# Altium PCB LED_48.PcbDoc
Units mm, origin at the board's own origin, x right, y up, seen from the top; angles counter-clockwise.
Board outline 72 x 72 mm, 2 copper layers (Top Layer, Bottom Layer); 49 components, 17 nets, 118 pads, 42 vias.
Unrouted connection lines stored in the file: 2.
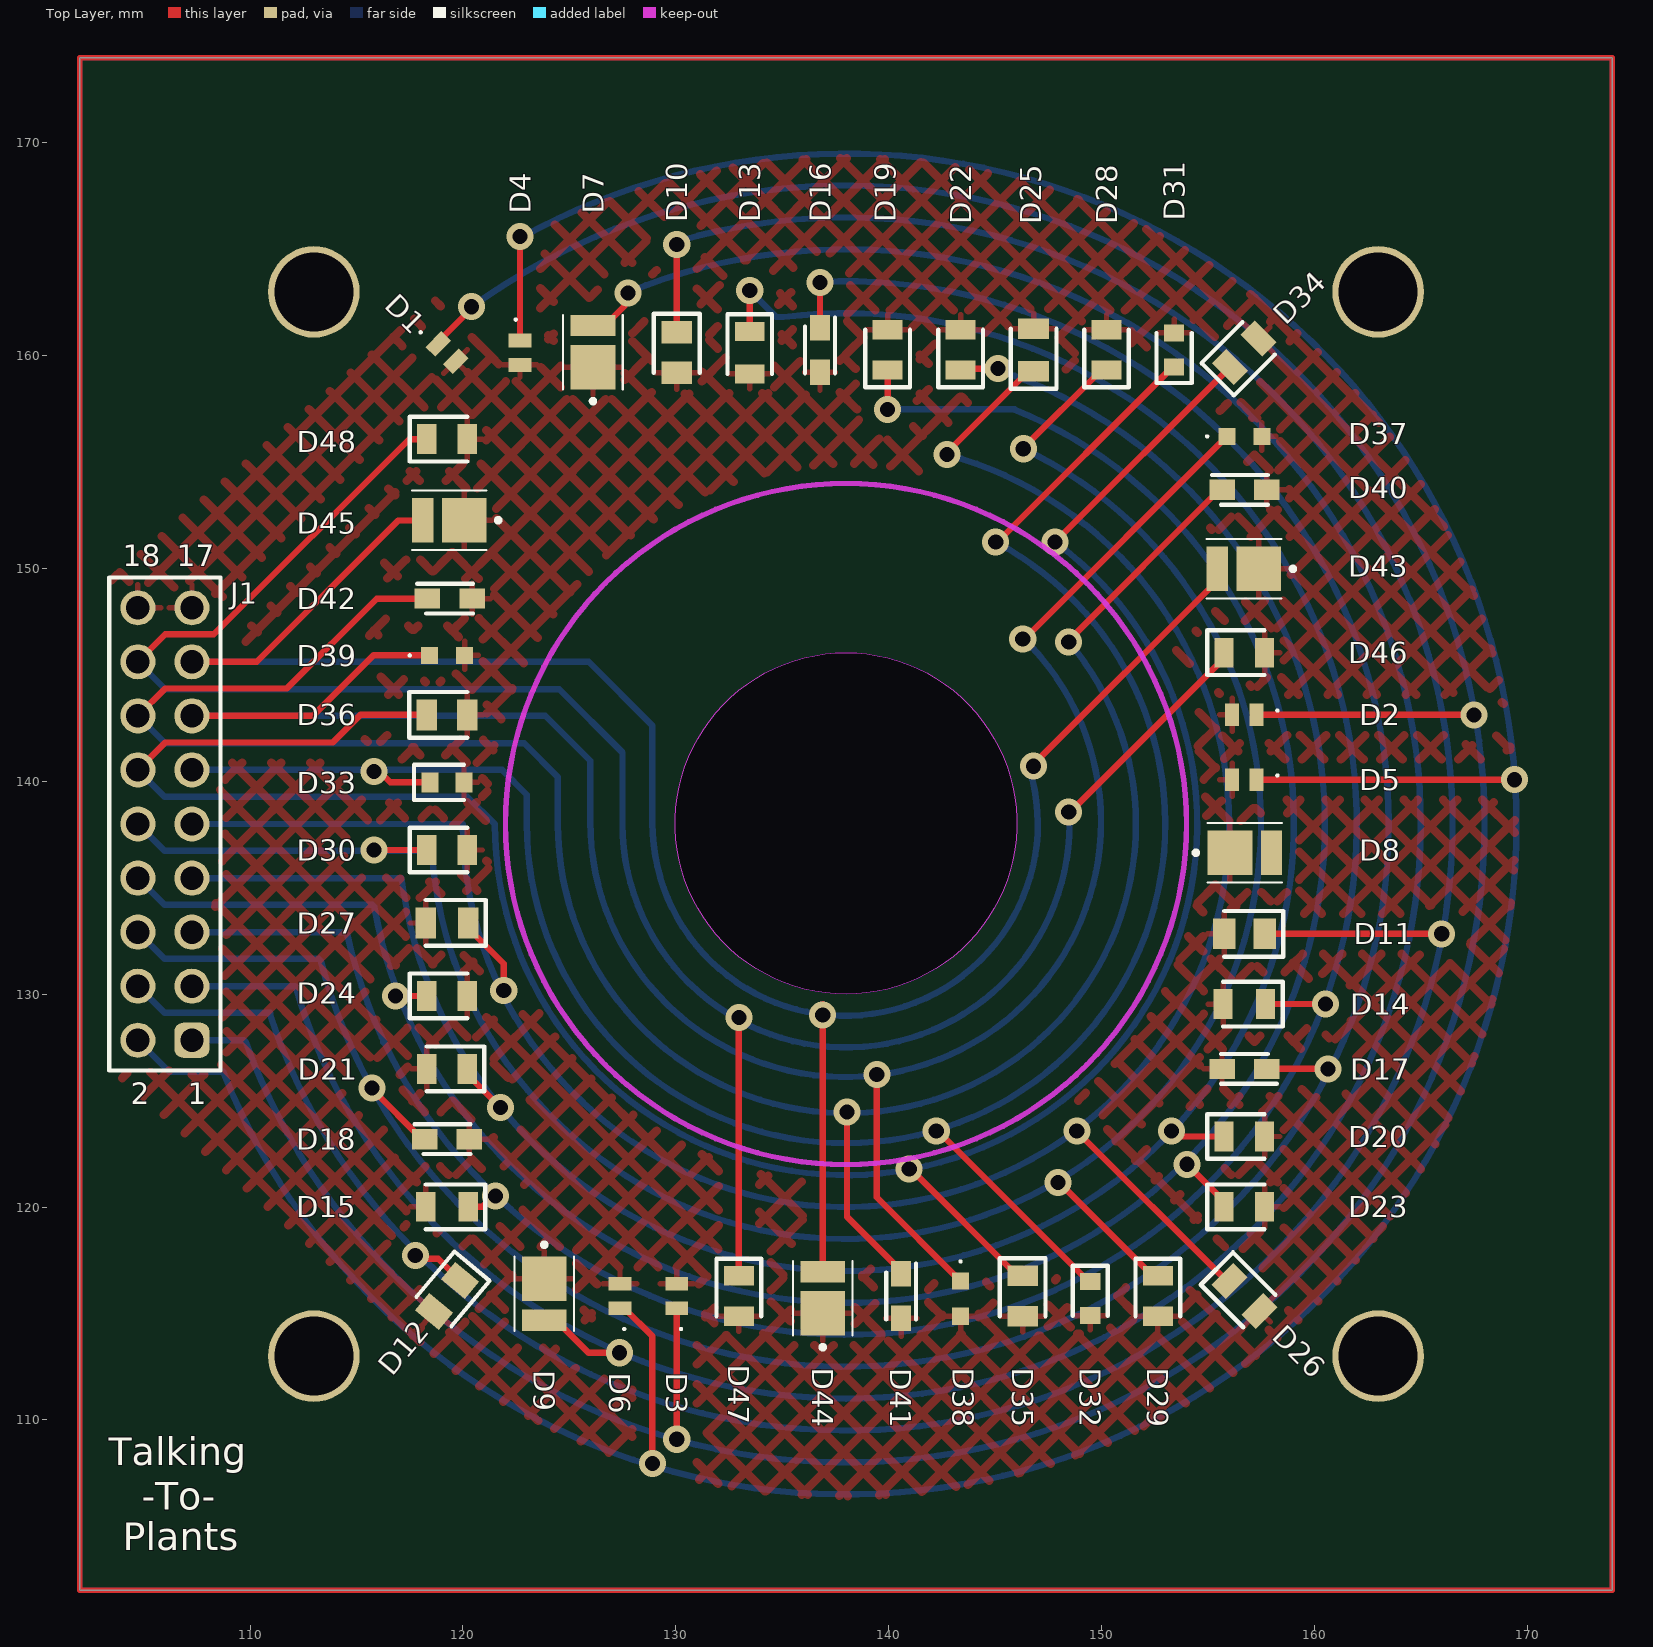
[diagram p0: Top Layer view]
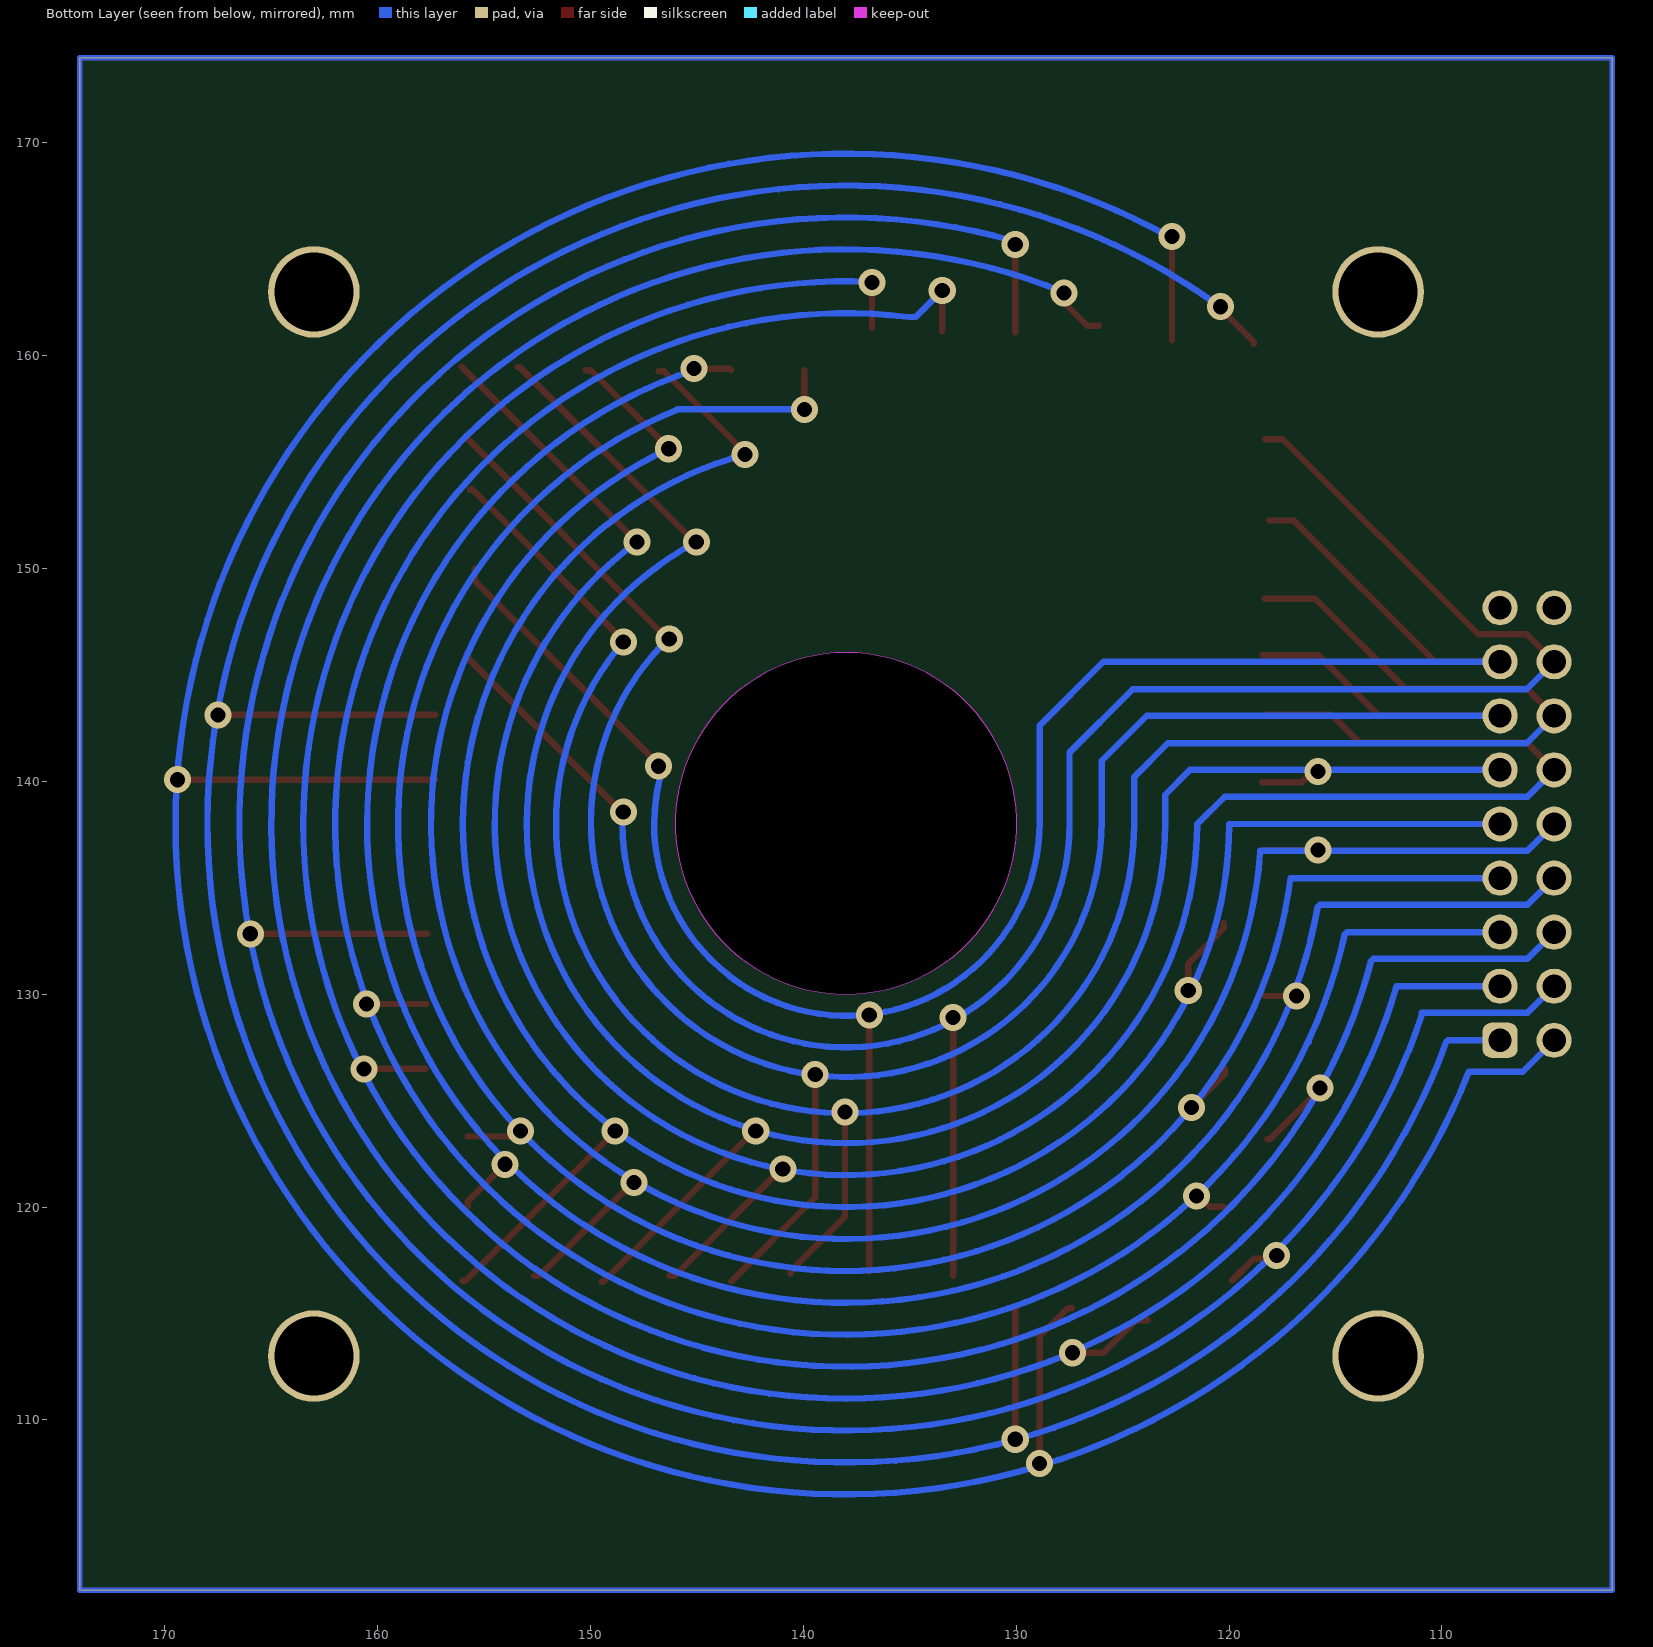
[diagram p1: Bottom Layer view, seen from below]

## Layer stack, top to bottom
Top Solder: solder mask 0.0102, Solder Resist, Dk 3.5
Top Layer: signal copper 0.0356
Dielectric 1: dielectric 0.32, FR-4, Dk 4.8
Bottom Layer: signal copper 0.0356
Bottom Solder: solder mask 0.0102, Solder Resist, Dk 3.5

## Board outline
102,102 102,174 174,174 174,102
cut-out: 138,130 cw(c138,138.025) 138,146.05 cw(c138,138.025)

## Design rules (kind name [scope] priority, off if disabled: settings)
Clearance [All] p1: gap=0.3 ignorepadtopadclearanceinfootprint=FALSE except(0.6: Arc-Fill Arc-Poly Arc-Region Track-Fill Track-Poly Track-Region SMDPad-Fill SMDPad-Poly SMDPad-Region THPad-Fill THPad-Poly THPad-Region Via-Fill Via-Poly Via-Region Fill-Fill Fill-Poly Fill-Region Poly-Poly Poly-Region Region-Region)
ComponentClearance [All] p1: gap=0.254 collisioncheckmode=3 verticalgap=0.254 showdistances=FALSE donotcheckwithout3dbody=TRUE
PolygonConnect [All] p1: connectstyle=Relief reliefconductorwidth=0.254 reliefentries=4 polygonreliefangle="90 Angle" airgapwidth=0.254
RoutingVias [All] p1: holewidth=0.711 width=1.27 viastyle="Through Hole" minholewidth=0.711 minwidth=1.27 maxholewidth=0.711 maxwidth=1.27
SolderMaskExpansion [All] p1: expansion=0.102 istentingtop=FALSE
Width [All] p1: maxlimit=1 minlimit=0.254 preferedwidth=0.254
29 further rules are at their usual default settings.

## Components (designator, comment, footprint, x,y, rotation, side; value= is the part's Value field where it differs from the comment)
D1 "ATS2012UV395" ATS2012UV395 119.253,160.147 r315 top
D2 "ATS2012UV395" ATS2012UV395 156.718,143.129 r180 top
D3 "ATS2012UV395" ATS2012UV395 130.048,115.824 r90 top
D4 "ATS2012UV395" ATS2012UV395 122.682,160.147 r270 top
D5 "ATS2012UV395" ATS2012UV395 156.718,140.081 r180 top
D6 "ATS2012UV395" ATS2012UV395 127.381,115.824 r90 top
D7 "150283DS73103" 150283DS73103 126.111,159.467 r90 top
D8 "150283DS73103" 150283DS73103 156.038,136.652 r0 top
D9 "150283DS73103" 150283DS73103 123.825,116.631 r270 top
D10 "599-0191-007F" LEDC2012X90N 130.048,160.147 r270 top
D11 "599-0191-007F" LEDC2012X90N 156.718,132.842 r180 top
D12 "599-0191-007F" LEDC2012X90N 119.253,115.824 r230 top
D13 "IN-S85ATG" LEDC2012X110N 133.477,160.147 r270 top
D14 "IN-S85ATG" LEDC2012X110N 156.718,129.54 r180 top
D15 "IN-S85ATG" LEDC2012X110N 119.253,120.015 r180 top
D16 "LT_M673-P2R1-25-Z" LEDM2214X140N 136.779,160.274 r270 top
D17 "LT_M673-P2R1-25-Z" LEDM2214X140N 156.718,126.492 r180 top
D18 "LT_M673-P2R1-25-Z" LEDM2214X140N 119.253,123.19 r0 top
D19 "SML-LX0805UWC-TR" LEDC2012X80N 139.954,160.274 r90 top
D20 "SML-LX0805UWC-TR" LEDC2012X80N 156.718,123.317 r0 top
D21 "SML-LX0805UWC-TR" LEDC2012X80N 119.253,126.492 r180 top
D22 "150080VS75000" LEDC2012X80N 143.383,160.274 r90 top
D23 "150080VS75000" LEDC2012X80N 156.718,120.015 r0 top
D24 "150080VS75000" LEDC2012X80N 119.253,129.921 r0 top
D25 "CMD17-21VYC/TR8" LEDC2012X120N 146.812,160.274 r90 top
D26 "CMD17-21VYC/TR8" LEDC2012X120N 156.718,115.824 r315 top
D27 "CMD17-21VYC/TR8" LEDC2012X120N 119.253,133.35 r180 top
D28 "150080YS75000" LEDC2012X80N 150.241,160.274 r90 top
D29 "150080YS75000" LEDC2012X80N 152.654,115.824 r270 top
D30 "150080YS75000" LEDC2012X80N 119.253,136.779 r0 top
D31 "APT1608SECK-AMT" LEDC1608X85N 153.416,160.274 r90 top
D32 "APT1608SECK-AMT" LEDC1608X85N 149.479,115.697 r270 top
D33 "APT1608SECK-AMT" LEDC1608X85N 119.253,139.954 r0 top
D34 "APT2012LSECK/J3-PRV" LEDC2012X75N 156.718,160.147 r45 top
D35 "APT2012LSECK/J3-PRV" LEDC2012X75N 146.304,115.824 r270 top
D36 "APT2012LSECK/J3-PRV" LEDC2012X75N 119.253,143.129 r0 top
D37 "APT1608SEC/J3-AMT" APT1608SECJ3AMT 156.718,156.21 r0 top
D38 "APT1608SEC/J3-AMT" APT1608SECJ3AMT 143.383,115.697 r270 top
D39 "APT1608SEC/J3-AMT" APT1608SECJ3AMT 119.253,145.923 r0 top
D40 "LT_M673-P2R1-25-Z" LEDM2214X140N 156.718,153.702 r0 top
D41 "LT_M673-P2R1-25-Z" LEDM2214X140N 140.589,115.824 r270 top
D42 "LT_M673-P2R1-25-Z" LEDM2214X140N 119.38,148.59 r0 top
D43 "150283FS73103" 150283DS73103 157.398,149.987 r180 top
D44 "150283FS73103" 150283DS73103 136.906,115.017 r90 top
D45 "150283FS73103" 150283DS73103 120.06,152.273 r180 top
D46 "APT2012SF4C-PRV" LEDC2012X85N 156.718,146.05 r0 top
D47 "APT2012SF4C-PRV" LEDC2012X85N 132.969,115.824 r270 top
D48 "APT2012SF4C-PRV" LEDC2012X85N 119.253,156.083 r0 top
J1 "61301821121" 61301821121 106,138 r90 top

## Footprints (in the part's own frame and the unit in brackets; to place one, negate y for a bottom-side part, rotate by r counter-clockwise, add the part's x,y. Pads: shape width x height; smd on the part's side, far side on the other; paste and mask are expansions set on the pad)
150283DS73103 [mm]
  rect 2.1x2.1 smd: 1(0,0)
  rect 1x2.1 smd: 2(1.95,0)
  silkscreen extent -1.7,-1.4 2.45,1.4, body extent -1.05,-1.4 2.45,1.4, height 0.95
61301821121 [mm] "Pin Header, pitch 2.54 mm, THT, Vertical, dual row, 18p"
  rrect50% 1.65x1.65 hole 1.1: 1(-10.16,-1.27)
  round 1.65 hole 1.1: 2(-10.16,1.27) 3(-7.62,-1.27) 4(-7.62,1.27) 5(-5.08,-1.27) 6(-5.08,1.27) 7(-2.54,-1.27) 8(-2.54,1.27) 9(0,-1.27) 10(0,1.27) 11(2.54,-1.27) 12(2.54,1.27) 13(5.08,-1.27) 14(5.08,1.27) 15(7.62,-1.27) 16(7.62,1.27) 17(10.16,-1.27) 18(10.16,1.27)
  silkscreen extent -11.58,-2.62 11.58,2.62, body extent -11.43,-2.54 11.43,2.54, height 8.59
APT1608SECJ3AMT [mm]
  rect 0.8x0.8 smd: 1(-0.825,0) 2(0.825,0)
  silkscreen extent -1.8,-0.05 -1.7,0.05
ATS2012UV395 [mm]
  rect 0.65x1.06 smd: 1(-0.575,0) 2(0.575,0)
  silkscreen extent -1.6,-0.25 -1.5,-0.15
LEDC1608X85N [mm]
  rect 0.8x0.95 smd: 1(-0.8,0) 2(0.8,0)
  silkscreen extent -1.55,-0.82 0.8,0.82
LEDC2012X75N [mm]
  rect 0.95x1.45 smd: 1(-0.95,0) 2(0.95,0)
  silkscreen extent -1.78,-1.07 0.95,1.07
LEDC2012X80N [mm]
  rect 0.9x1.4 smd: 1(-0.95,0) 2(0.95,0)
  silkscreen extent -1.75,-1.05 0.95,1.05
LEDC2012X85N [mm]
  rect 0.9x1.4 smd: 1(-0.95,0) 2(0.95,0)
  silkscreen extent -1.75,-1.05 0.95,1.05
LEDC2012X90N [mm]
  rect 1.05x1.45 smd: 1(-0.95,0) 2(0.95,0)
  silkscreen extent -1.83,-1.07 0.95,1.08
LEDC2012X110N [mm]
  rect 0.9x1.4 smd: 1(-1,0) 2(1,0)
  silkscreen extent -1.8,-1.05 1,1.05
LEDC2012X120N [mm]
  rect 0.95x1.45 smd: 1(-1,0) 2(1,0)
  silkscreen extent -1.83,-1.07 1,1.07
LEDM2214X140N [mm]
  rect 1.2x0.95 smd: 1(-1.05,0) 2(1.05,0)
  silkscreen extent -1.53,-0.7 1.1,0.7

## Part data
D1 D2 D3 D4 D5 D6: "Standard LEDs - SMD 2x1.2mm UV SMD", Manufacturer_Name=Kingbright, Mouser Part Number=604-ATS2012UV395, Arrow Part Number=ATS2012UV395, Arrow Price/Stock=https://www.arrow.com/en/products/ats2012uv395/kingbright, Datasheet Link=https://www.arrow.com/en/products/ats2012uv395/kingbright, Geometry.Height=1mm, Manufacturer_Part_Number=ATS2012UV395, Mouser Price/Stock=https://www.mouser.co.uk/ProductDetail/Kingbright/ATS2012UV395?qs=%252BEew9%252B0nqrCgwxEBSEvg7Q%3D%3D
D7 D8 D9: "LED", Manufacturer_Name="Wurth Elektronik", Mouser Part Number=710-150283DS73103, Datasheet Link=https://www.mouser.jp/datasheet/2/445/150283DS73103-1838914.pdf, Height=0.85mm, Manufacturer_Part_Number=150283DS73103, Mouser Price/Stock=https://www.mouser.co.uk/ProductDetail/Wurth-Elektronik/150283DS73103/?qs=GedFDFLaBXFC8uVfOF%252Bhgw%3D%3D
D10 D11 D12: "Standard LEDs - SMD SMD 0805 BLUE", Manufacturer_Name=Dialight, Mouser Part Number=645-599-0191-007F, Datasheet Link=https://componentsearchengine.com/Datasheets/1/599-0191-007F.pdf, Geometry.Height=0.9mm, Manufacturer_Part_Number=599-0191-007F, Mouser Price/Stock=https://www.mouser.co.uk/ProductDetail/Dialight/599-0191-007F?qs=gTYE2QTfZfTbWzs5Ohdbbg%3D%3D
D13 D14 D15: "Standard LEDs - SMD True Green LED", Manufacturer_Name=Inolux, Mouser Part Number=743-IN-S85ATG, Datasheet Link=http://www.inolux-corp.com/datasheet/SMDLED/Mono%20Color%20Top%20View/IN-S85AT%20Series_V1.1.pdf, Geometry.Height=1.1mm, Manufacturer_Part_Number=IN-S85ATG, Mouser Price/Stock=https://www.mouser.co.uk/ProductDetail/Inolux/IN-S85ATG?qs=fAHHVMwC%252BbhWv0EIR%2FKEPw%3D%3D
D16 D17 D18 D40 D41 D42: "Standard LEDs - SMD True Green, 532nm 140mcd, 10mA", Manufacturer_Name=OSRAM, Manufacturer_Part_Number="LT M673-P2R1-25-Z", Mouser Part Number=720-LTM673P2R125Z, Datasheet Link=https://media.digikey.com/pdf/Data%20Sheets/Osram%20PDFs/LT_M673_Version1.1_June2013.pdf, Geometry.Height=1.4mm, Mouser Price/Stock=https://www.mouser.co.uk/ProductDetail/OSRAM-Opto-Semiconductors/LT-M673-P2R1-25-Z?qs=nTDll3UaDK7W5Gk6Y9krcg%3D%3D
D19 D20 D21: "Standard LEDs - SMD White, Water Clear 3.5V, 150mcd", Manufacturer_Name=Dialight, Manufacturer_Part_Number=599-0191-007F, Mouser Part Number=645-599-0191-007F, Datasheet Link=https://componentsearchengine.com/Datasheets/1/599-0191-007F.pdf, Geometry.Height=0.9mm, Mouser Price/Stock=https://www.mouser.co.uk/ProductDetail/Dialight/599-0191-007F?qs=gTYE2QTfZfTbWzs5Ohdbbg%3D%3D
D22 D23 D24: "Standard LEDs - SMD WL-SMCW SMDMono TpVw Waterclr 0805 BrtGrn", Manufacturer_Name=Dialight, Manufacturer_Part_Number=599-0191-007F, Mouser Part Number=645-599-0191-007F, Datasheet Link=https://componentsearchengine.com/Datasheets/1/599-0191-007F.pdf, Geometry.Height=0.9mm, Mouser Price/Stock=https://www.mouser.co.uk/ProductDetail/Dialight/599-0191-007F?qs=gTYE2QTfZfTbWzs5Ohdbbg%3D%3D
D25 D26 D27: "Standard LEDs - SMD YELLOW WATER CLEAR", Manufacturer_Name=Dialight, Manufacturer_Part_Number=599-0191-007F, Mouser Part Number=645-599-0191-007F, Datasheet Link=https://componentsearchengine.com/Datasheets/1/599-0191-007F.pdf, Geometry.Height=0.9mm, Mouser Price/Stock=https://www.mouser.co.uk/ProductDetail/Dialight/599-0191-007F?qs=gTYE2QTfZfTbWzs5Ohdbbg%3D%3D
D28 D29 D30: library part SML-LX0805UWC-TR, "Standard LEDs - SMD WL-SMCW SMDMono TpVw Waterclr 0805 Yellow", Manufacturer_Name=Dialight, Manufacturer_Part_Number=599-0191-007F, Mouser Part Number=645-599-0191-007F, Datasheet Link=https://componentsearchengine.com/Datasheets/1/599-0191-007F.pdf, Geometry.Height=0.9mm, Mouser Price/Stock=https://www.mouser.co.uk/ProductDetail/Dialight/599-0191-007F?qs=gTYE2QTfZfTbWzs5Ohdbbg%3D%3D
D31 D32 D33: "Standard LEDs - SMD 1.6x0.8mm Orange", Manufacturer_Name=Dialight, Manufacturer_Part_Number=599-0191-007F, Mouser Part Number=645-599-0191-007F, Datasheet Link=https://componentsearchengine.com/Datasheets/1/599-0191-007F.pdf, Geometry.Height=0.9mm, Mouser Price/Stock=https://www.mouser.co.uk/ProductDetail/Dialight/599-0191-007F?qs=gTYE2QTfZfTbWzs5Ohdbbg%3D%3D
D34 D35 D36: "Standard LEDs - SMD 2.0X1.2MM LOW CRNT", Arrow Part Number=ATS2012UV395, Manufacturer_Name=Kingbright, Mouser Part Number=604-ATS2012UV395, Arrow Price/Stock=https://www.arrow.com/en/products/ats2012uv395/kingbright, Datasheet Link=https://www.arrow.com/en/products/ats2012uv395/kingbright, Geometry.Height=1mm, Manufacturer_Part_Number=ATS2012UV395, Mouser Price/Stock=https://www.mouser.co.uk/ProductDetail/Kingbright/ATS2012UV395?qs=%252BEew9%252B0nqrCgwxEBSEvg7Q%3D%3D
D37 D38 D39: "Standard LEDs - SMD 1.6x0.8mm Red", Arrow Part Number=ATS2012UV395, Manufacturer_Name=Kingbright, Mouser Part Number=604-ATS2012UV395, Arrow Price/Stock=https://www.arrow.com/en/products/ats2012uv395/kingbright, Datasheet Link=https://www.arrow.com/en/products/ats2012uv395/kingbright, Geometry.Height=1mm, Manufacturer_Part_Number=ATS2012UV395, Mouser Price/Stock=https://www.mouser.co.uk/ProductDetail/Kingbright/ATS2012UV395?qs=%252BEew9%252B0nqrCgwxEBSEvg7Q%3D%3D
D43 D44 D45: library part 150283DS73103, "LED", Manufacturer_Name="Wurth Elektronik", Mouser Part Number=710-150283DS73103, Datasheet Link=https://www.mouser.jp/datasheet/2/445/150283DS73103-1838914.pdf, Height=0.85mm, Manufacturer_Part_Number=150283DS73103, Mouser Price/Stock=https://www.mouser.co.uk/ProductDetail/Wurth-Elektronik/150283DS73103/?qs=GedFDFLaBXFC8uVfOF%252Bhgw%3D%3D
D46 D47 D48: "Infrared Emitters IR 880nm 120 deg Water Clear 1 mW/sr", Arrow Part Number=ATS2012UV395, Manufacturer_Name=Kingbright, Mouser Part Number=604-ATS2012UV395, Arrow Price/Stock=https://www.arrow.com/en/products/ats2012uv395/kingbright, Datasheet Link=https://www.arrow.com/en/products/ats2012uv395/kingbright, Geometry.Height=1mm, Manufacturer_Part_Number=ATS2012UV395, Mouser Price/Stock=https://www.mouser.co.uk/ProductDetail/Kingbright/ATS2012UV395?qs=%252BEew9%252B0nqrCgwxEBSEvg7Q%3D%3D
J1: library part CMP-1502-01101-2, Color=Black, Contact Resistance=20mΩ, Current Rating=3A, Operating Supply Voltage=250V, Connector Type="Male Pin", Contact Material=Copper, Contact Mating Length=5.9944mm, Contact Plating=Gold, Gender=Male, Lead Pitch=2.54mm, Mount="Through Hole", NexarPartId=32855553, Number of contacts=18, Number of Pins=18, Number of Positions=18, Number Of Rows=2, Orientation=Vertical, Packaging=Bulk, Pitch=2.54mm, REACH SVHC=Unknown, RoHS=Compliant, Row Spacing=2.54mm, Termination=Solder

## Free pads (board coordinates)
  round 4.3 hole 3.7: 7(113,113) 7(113,163) 7(163,113) 7(163,163)

## Via types
v1: diameter 1.27, hole 0.711, Top Layer to Bottom Layer, 42 vias

## Nets (pads, with @x,y where several pads share a name; then routed paths per layer and width w, separated by ;. In a path a pad name is that pad's centre, name@x,y a point inside that pad or via, vN(x,y) a via of type N, cw(c..) or ccw(c..) an arc to the next point about the centre after c; other vN are vias at no path point)
0-: D1.1 D2.1 D3.1 J1.1 | length 171.1
  Top Layer w0.3: D1.1 118.846,160.655 120.396,162.205 v1(120.396,162.306) ; v1(130.048,109.093) D3.1 ; D2.1 v1(167.513,143.129)
  Bottom Layer w0.3: J1.1 109.712,127.84 109.807,127.745 ccw(c138,138) v1@120.444,162.327 ; 116.263,127.753 cw(c116.052,127.54) 116.265,127.751 116.301,127.716
1-: D4.1 D5.1 D6.1 J1.2 | length 182.1
  Top Layer w0.3: D4.1 v1(122.682,165.608) ; D6.1 127.586,115.249 128.905,113.93 v1(128.905,107.95) ; D5.1 v1(169.418,140.081)
  Bottom Layer w0.3: J1.2 106.205,126.365 108.743,126.365 ; 108.743,126.327 ccw(c138,138) v1@122.717,165.544
2-: D7.2 D8.2 D9.2 J1.3 | length 141.6
  Top Layer w0.3: D9.2 124.375,114.681 125.899,113.157 v1(127.364,113.157) ; D7.2 126.661,161.417 127.576,162.332 127.576,162.755 v1(127.762,162.941)
  Bottom Layer w0.3: J1.3 112.132,130.38 ccw(c138,137.954) 138,111 ccw(c138,138) v1@127.753,162.98
3-: D10.1 D11.1 D12.1 J1.4 | length 154.9
  Top Layer w0.3: v1(117.763,117.729) 117.925,117.567 118.848,117.567 D12.1 ; D10.1 v1(130.048,165.227) ; D11.1 v1(165.989,132.842)
  Bottom Layer w0.3: J1.4 105.982,129.128 110.94,129.128 ; 110.94,129.055 ccw(c138,138) v1@130.128,165.391
3v3: D1.2 D2.2 D3.2 D4.2 D5.2 D6.2 D7.1 D8.1 D9.1 D10.2 D11.2 D12.2 D13.2 D14.2 D15.2 D16.2 D17.2 D18.2 D19.2 D20.2 D21.2 D22.2 D23.2 D24.2 D25.2 D26.2 D27.2 D28.2 D29.2 D30.2 D31.2 D32.2 D33.2 D34.2 D35.2 D36.2 D37.2 D38.2 D39.2 D40.2 D41.2 D42.2 D43.1 D44.1 D45.1 D46.2 D47.2 D48.2 J1.17 J1.18
4-: D13.1 D14.1 D15.1 J1.5 | length 126.5
  Top Layer w0.3: D15.1 120.904,120.015 121.412,120.523 v1(121.539,120.523) ; D13.1 v1(133.477,163.068) ; D14.1 v1(160.528,129.54)
  Bottom Layer w0.3: J1.5 114.463,132.92 114.566,132.817 ccw(c138,138) 135.061,161.819 134.726,161.819 v1(133.477,163.068)
5-: D16.1 D17.1 D18.1 J1.6 | length 132.6
  Top Layer w0.3: v1(115.735,125.603) 115.735,125.533 118.078,123.19 D18.1 ; D16.1 v1(136.779,163.449) ; D17.1 v1(160.655,126.492)
  Bottom Layer w0.3: J1.6 105.982,131.668 113.235,131.668 113.321,131.582 ccw(c138,138) v1@136.778,163.471
6-: D19.1 D20.1 D21.1 J1.7 | length 111.1
  Top Layer w0.3: D21.1 120.203,126.242 v1(121.76,124.685) ; v1(139.954,157.48) D19.1 ; v1(153.289,123.571) 153.543,123.317 154.686,123.317 D20.1
  Bottom Layer w0.3: J1.7 117.117,135.46 ccw(c138.049,138.097) 138.049,117 ccw(c138.049,138) 145.893,157.48 ; v1(139.954,157.48) 145.893,157.48 ; 145.923,157.48 145.893,157.48
7-: D22.1 D23.1 D24.1 J1.8 | length 112.6
  Top Layer w0.3: v1(116.84,129.921) D24.1 ; D22.1 143.455,159.396 v1(145.15,159.396) ; v1(154.02,122.013) 155.768,120.265 D23.1
  Bottom Layer w0.3: J1.8 105.982,134.208 115.744,134.208 115.838,134.114 ccw(c138,138) 145.145,159.335 145.145,159.391 v1(145.15,159.396)
8-: D25.1 D26.1 D27.1 J1.9 | length 112.5
  Top Layer w0.3: D27.1 120.253,133.1 121.92,131.433 v1(121.92,130.169) ; v1(142.737,155.365) 142.737,155.449 146.562,159.274 D25.1 ; v1(148.844,123.571) 155.884,116.531 D26.1
  Bottom Layer w0.3: J1.9 120,138 ccw(c138,138) v1(142.737,155.365)
9-: D28.1 D29.1 D30.1 J1.10 | length 110.7
  Top Layer w0.3: v1(115.824,136.779) D30.1 ; v1(146.33,155.631) 146.33,155.663 149.991,159.324 D28.1 ; v1(147.955,121.158) 148.02,121.158 152.404,116.774 D29.1
  Bottom Layer w0.3: J1.10 105.982,136.748 118.546,136.748 ; 118.546,136.656 ccw(c138,138) v1(146.33,155.631)
10-: D31.1 D32.1 D33.1 J1.11 | length 105.8
  Top Layer w0.3: v1(115.824,140.462) 116.086,140.462 116.594,139.954 D33.1 ; v1(142.24,123.571) 142.33,123.571 149.404,116.497 D32.1 ; v1(145.034,151.257) 145.124,151.257 153.341,159.474 D31.1
  Bottom Layer w0.3: J1.11 121.842,140.54 123,139.382 123,138 ccw(c138,138) v1@145.03,151.25
11-: D34.1 D35.1 D36.1 J1.12 | length 118.7
  Top Layer w0.3: J1.12 106.018,141.828 113.888,141.828 115.189,143.129 D36.1 ; v1(140.97,121.793) 141.035,121.793 146.054,116.774 D35.1 ; v1(147.828,151.257) D34.1
  Bottom Layer w0.3: J1.12 105.982,139.288 120.212,139.288 121.5,138 ccw(c138,138) v1@147.826,151.255
12-: D37.1 D38.1 D39.1 J1.13 | length 106.9
  Top Layer w0.3: J1.13 112.956,143.08 115.799,145.923 D39.1 ; v1(139.446,126.238) 139.446,120.459 D38.1 ; v1(146.304,146.685) 146.368,146.685 D37.1
  Bottom Layer w0.3: J1.13 123.874,143.08 125.984,140.97 125.984,138.109 ccw(c137.981,138.108) v1@146.35,146.704
13-: D40.1 D41.1 D42.1 J1.14 | length 110
  Top Layer w0.3: J1.14@104.853,143.08 J1.14 106.018,144.368 111.729,144.368 115.951,148.59 D42.1 ; v1(138.049,124.46) 138.049,119.539 140.589,116.999 D41.1 ; v1(148.463,146.558) 148.463,146.622 155.543,153.702 D40.1
  Bottom Layer w0.3: J1.14 106.018,141.792 122.876,141.792 124.46,140.208 124.46,138 ccw(c138.04,137.994) 151.621,137.998 ccw(c138.446,138) v1(148.463,146.558)
14-: D43.2 D44.2 D45.2 J1.15 | length 97.5
  Top Layer w0.3: J1.15 110.314,145.62 116.955,152.261 118.098,152.261 D45.2 ; D44.2 v1@136.906,129.545 ; v1(146.812,140.716) 146.812,140.801 155.448,149.437 D43.2
  Bottom Layer w0.3: J1.15 125.906,145.62 128.905,142.621 128.905,138.053 ccw(c137.961,138.045) 147.017,138.047 ccw(c146.717,138.046) 147.016,138.052 ccw(c137.583,137.876) v1@146.625,140.571
  other v1: 136.906,129.032
15-: D46.1 D47.1 D48.1 J1.16 | length 102
  Top Layer w0.3: J1.16 106.018,146.908 108.3,146.908 117.475,156.083 D48.1 ; D47.1 v1(132.969,128.905) ; v1(148.463,138.557) 148.525,138.557 155.768,145.8 D46.1
  Bottom Layer w0.3: J1.16 106.018,144.332 124.527,144.332 127.5,141.359 127.5,138 ccw(c138,138) v1@148.486,138.552

## Polygon pours and split planes (outlines as drawn)
3v3 on Top Layer "NONET_L-01_P-001" (hatched 45Degree grid 1.3 track 0.4, remove dead copper, pour order 0): 103.5,149.5 119.26,163.086 cw(c138.003,137.856) 118.484,113.221 103.5,126.5

## Keep-outs
Top Layer:
  circle w0.254: c138,138 r16

## Other copper
Multi-Layer:
  the board outline again, w0.254

## Silkscreen, mask and mechanical layers (free items; w line width, h text height)
Top Overlay:
  text "Talking" at 103.363,107.875 h1.3
  text "-To-" at 104.902,105.791 h1.3
  text "Plants" at 104.013,103.886 h1.3
Mechanical 2:
  lines w0.254: 119.3,115.825 156.7,115.825 156.7,160.175 119.3,160.175 119.3,115.825

## Text inside footprints (layer, text, board x,y; h text height)
J1: Top Overlay "18" at 104.013,150.114 h1.02; Top Overlay "17" at 106.553,150.114 h1.02; Top Overlay "2" at 104.394,124.841 h1.02; Top Overlay "1" at 107.061,124.841 h1.02